# Altium PCB ARDUINOUNOR3_2021-12-07.pcbdoc
Units mil, origin at the board's own origin, x right, y up, seen from the top; angles counter-clockwise.
Board outline 3770 x 3120 mil, 2 copper layers (Top Layer, Bottom Layer); 1 components, 0 nets, 34 pads, 0 vias.
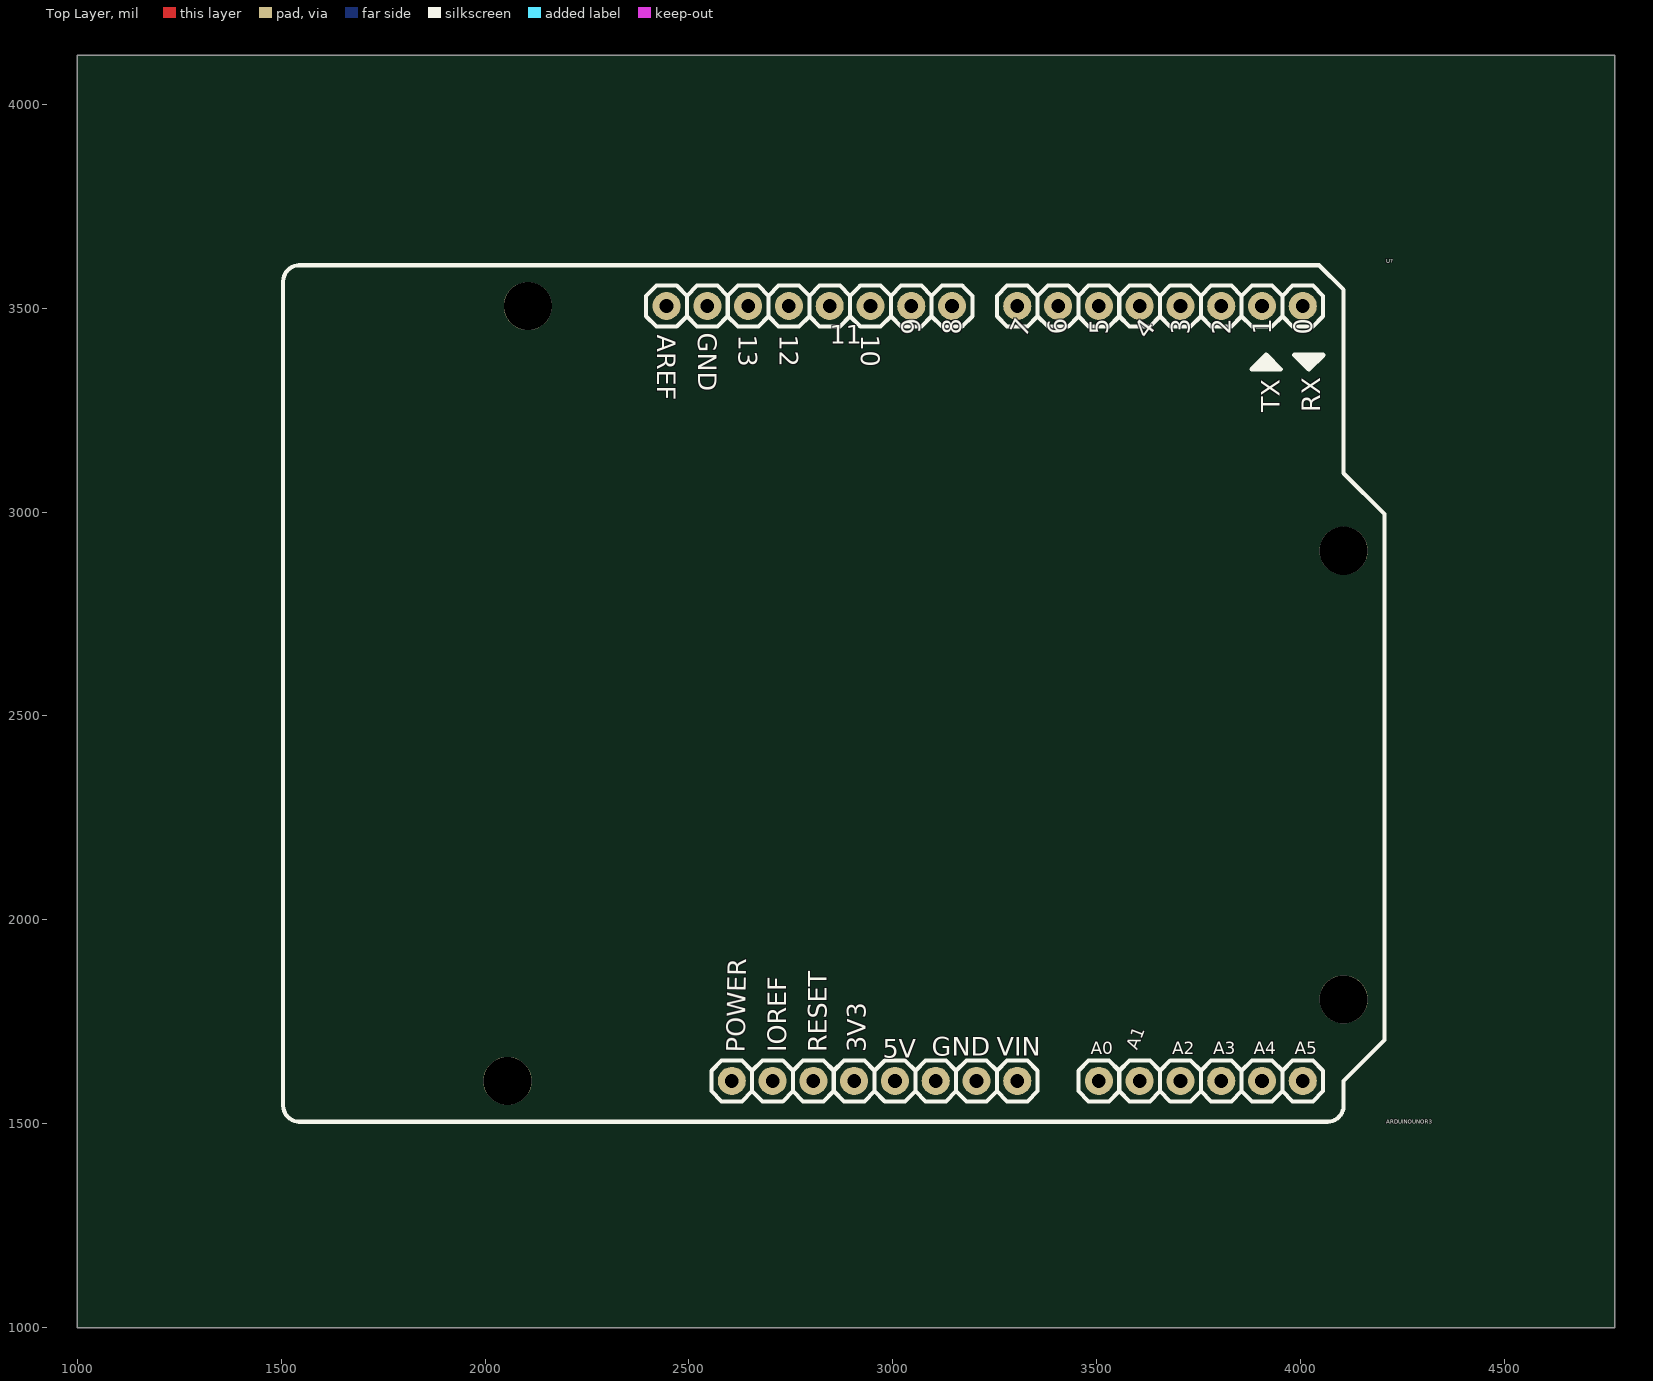
[diagram p0: Top Layer view]
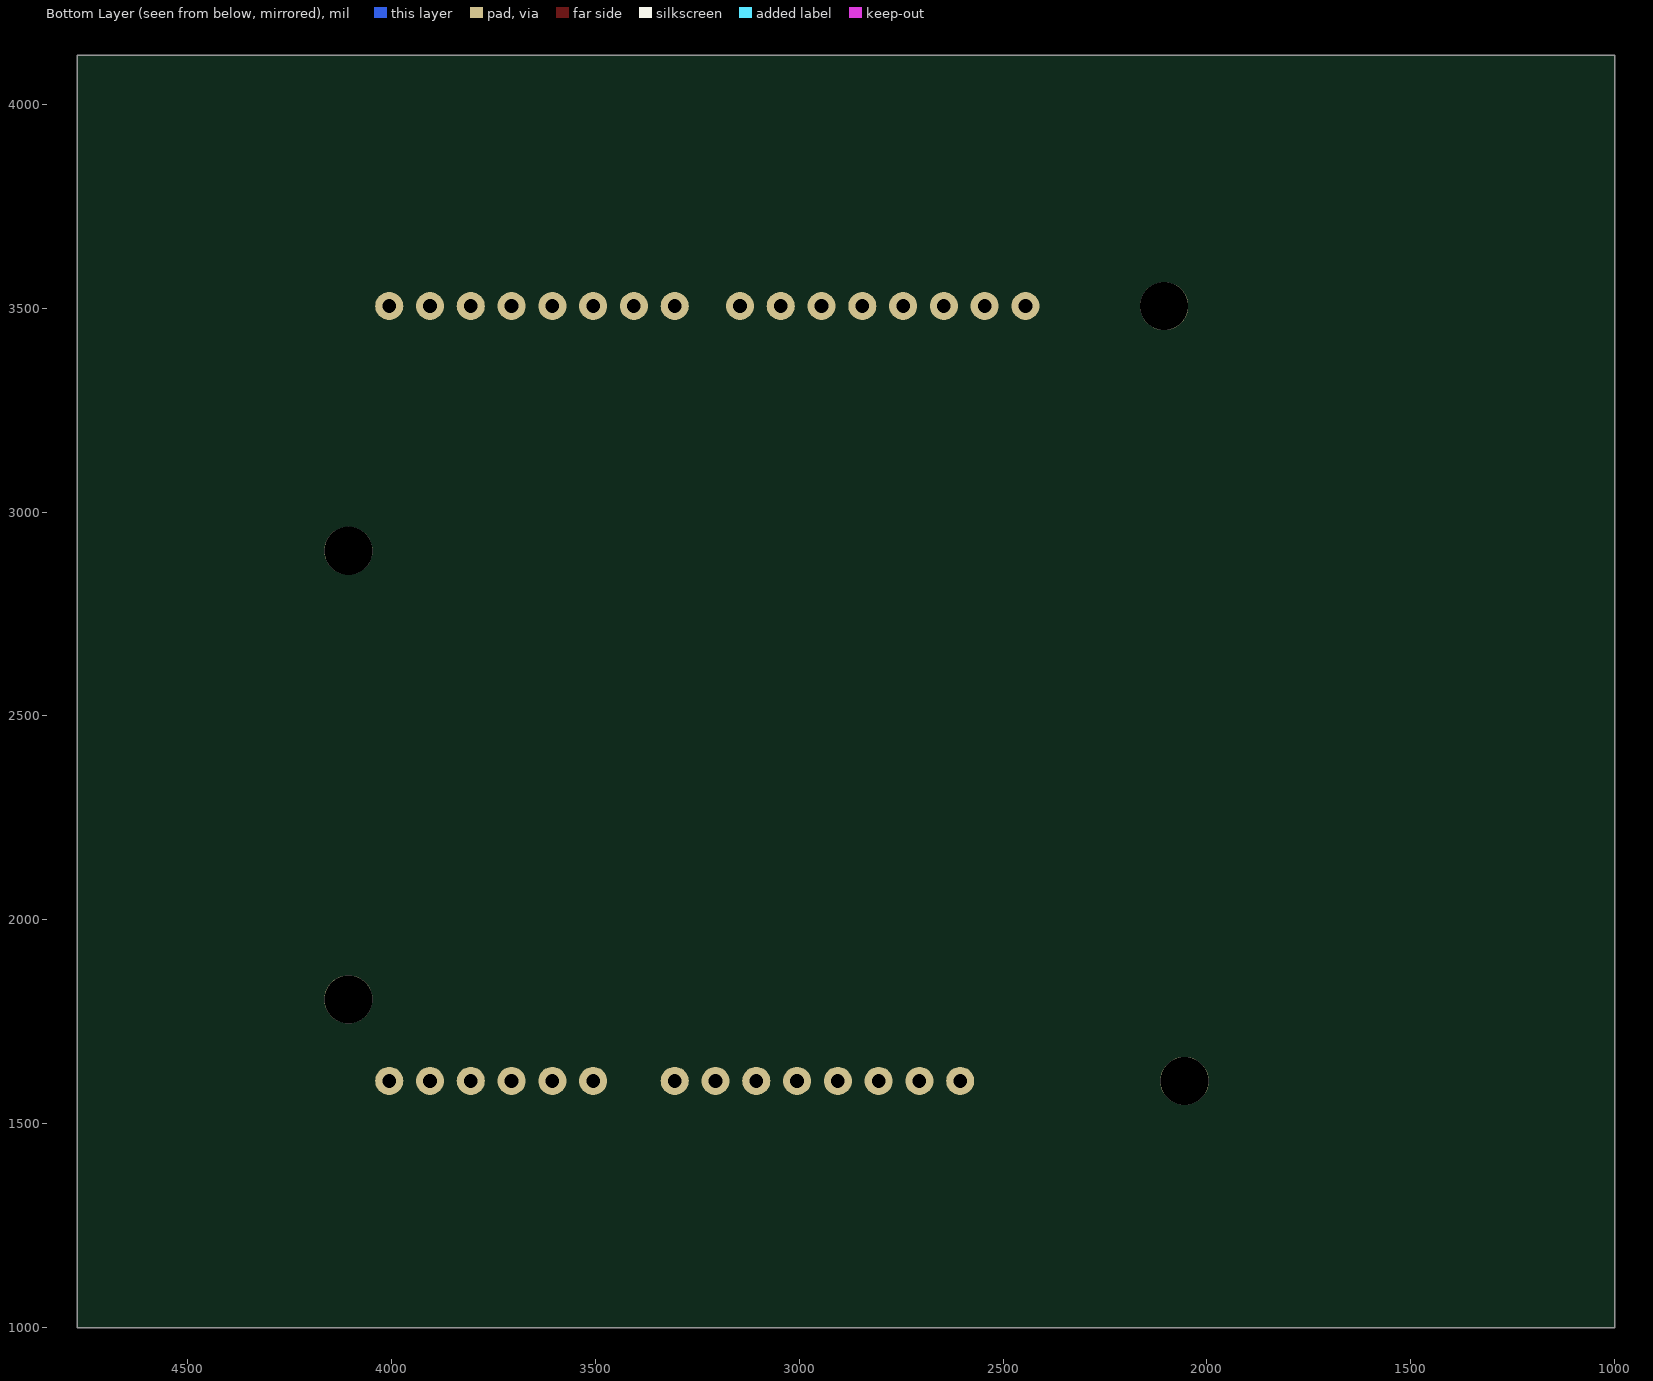
[diagram p1: Bottom Layer view, seen from below]

## Layer stack, top to bottom
Top Layer: signal copper (thickness not stored)
Dielectric: dielectric 12.6, FR-4, Dk 4.8
Bottom Layer: signal copper (thickness not stored)

## Board outline
4770,1000 1000,1000 1000,4120 4770,4120

## Components (designator, comment, footprint, x,y, rotation, side; value= is the part's Value field where it differs from the comment)
U? "ARDUINOUNOR3" ARDUINOUNOR3 2855,2555 r0 top

## Footprints (in the part's own frame and the unit in brackets; to place one, negate y for a bottom-side part, rotate by r counter-clockwise, add the part's x,y. Pads: shape width x height; smd on the part's side, far side on the other; paste and mask are expansions set on the pad)
ARDUINOUNOR3 [mm]
  round 1.75 hole 0.85: 1(7.366,24.13) 2(4.826,24.13) 3(2.286,24.13) 4(-0.254,24.13) 5(-2.794,24.13) 6(-5.334,24.13) 7(-7.874,24.13) 8(-10.414,24.13) 11(29.21,24.13) 12(26.67,24.13) 13(24.13,24.13) 14(21.59,24.13) 15(19.05,24.13) 16(16.51,24.13) 17(13.97,24.13) 18(11.43,24.13) 19(16.51,-24.13) 20(19.05,-24.13) 21(21.59,-24.13) 22(24.13,-24.13) 23(26.67,-24.13) 24(29.21,-24.13) 25(-6.35,-24.13) 26(-3.81,-24.13) 27(-1.27,-24.13) 28(1.27,-24.13) 29(3.81,-24.13) 30(6.35,-24.13) 31(8.89,-24.13) 32(11.43,-24.13)
  round 3 hole 3 unplated: ""(-20.32,-24.13) ""(-19.05,24.13) ""(31.75,-19.05) ""(31.75,8.89)
  silkscreen extent -34.29,-26.67 34.29,26.67

## Nets (pads, with @x,y where several pads share a name; then routed paths per layer and width w, separated by ;. In a path a pad name is that pad's centre, name@x,y a point inside that pad or via, vN(x,y) a via of type N, cw(c..) or ccw(c..) an arc to the next point about the centre after c; other vN are vias at no path point)
pads on no net: U?. U?.1 U?.2 U?.3 U?.4 U?.5 U?.6 U?.7 U?.8 U?.11 U?.12 U?.13 U?.14 U?.15 U?.16 U?.17 U?.18 U?.19 U?.20 U?.21 U?.22 U?.23 U?.24 U?.25 U?.26 U?.27 U?.28 U?.29 U?.30 U?.31 U?.32

## Silkscreen, mask and mechanical layers (free items; w line width, h text height)
Document:
  lines w0.1: 2884,2559 2886,2561

## Text inside footprints (layer, text, board x,y; h text height)
U?: Top Overlay "5V" at 2975,1661.99 h46; Top Overlay "A0" at 3485,1669.99 h30; Top Overlay "AREF" at 2422,3434.99 h46 r270; Top Overlay "GND" at 2523,3439.99 h46 r270; Top Overlay "TX" at 3948,3244.99 h46 r90; Top Overlay "RX" at 4048,3244.99 h46 r90; Top Overlay "RESET" at 2838,1674.99 h46 r90; Top Overlay "3V3" at 2933.1,1675.39 h46 r90; Top Overlay "A1" at 3599,1679.61 h30 r69; Top Overlay "A2" at 3685,1669.99 h30; Top Overlay "A3" at 3785,1669.99 h30; Top Overlay "A4" at 3885,1669.99 h30; Top Overlay "A5" at 3985,1669.99 h30; Top Overlay "VIN" at 3255,1666.89 h46; Top Overlay "GND" at 3095,1666.89 h46; Top Overlay "13" at 2622,3434.99 h46 r270; Top Overlay "12" at 2722,3434.99 h46 r270; Top Overlay "11" at 2845,3411.99 h46; Top Overlay "10" at 2922,3434.99 h46 r270; Top Overlay "9" at 3067.91,3436.99 h46 r95; Top Overlay "8" at 3168,3434.99 h46 r90; Top Overlay "7" at 3325.84,3425.27 h46 r65; Top Overlay "6" at 3427.91,3436.99 h46 r95; Top Overlay "5" at 3528,3434.99 h46 r90; Top Overlay "4" at 3623.61,3421.47 h46 r54; Top Overlay "3" at 3728,3434.99 h46 r90; Top Overlay "2" at 3828,3434.99 h46 r90; Top Overlay "1" at 3928,3434.99 h46 r90; Top Overlay "0" at 4028,3434.99 h46 r90; Top Overlay "IOREF" at 2738,1674.99 h46 r90; Top Overlay "POWER" at 2636.8,1674.59 h46 r89